# Altium PCB Jump Starter.PcbDoc (part 1 of 2)
Units mm, origin at the board's own origin, x right, y up, seen from the top; angles counter-clockwise.
Board outline 188.98 x 144.65 mm, 2 copper layers (Top Layer, Bottom Layer), stack 1.671 mm thick; 96 components, 60 nets, 320 pads, 764 vias.
Unrouted connection lines stored in the file: 5.
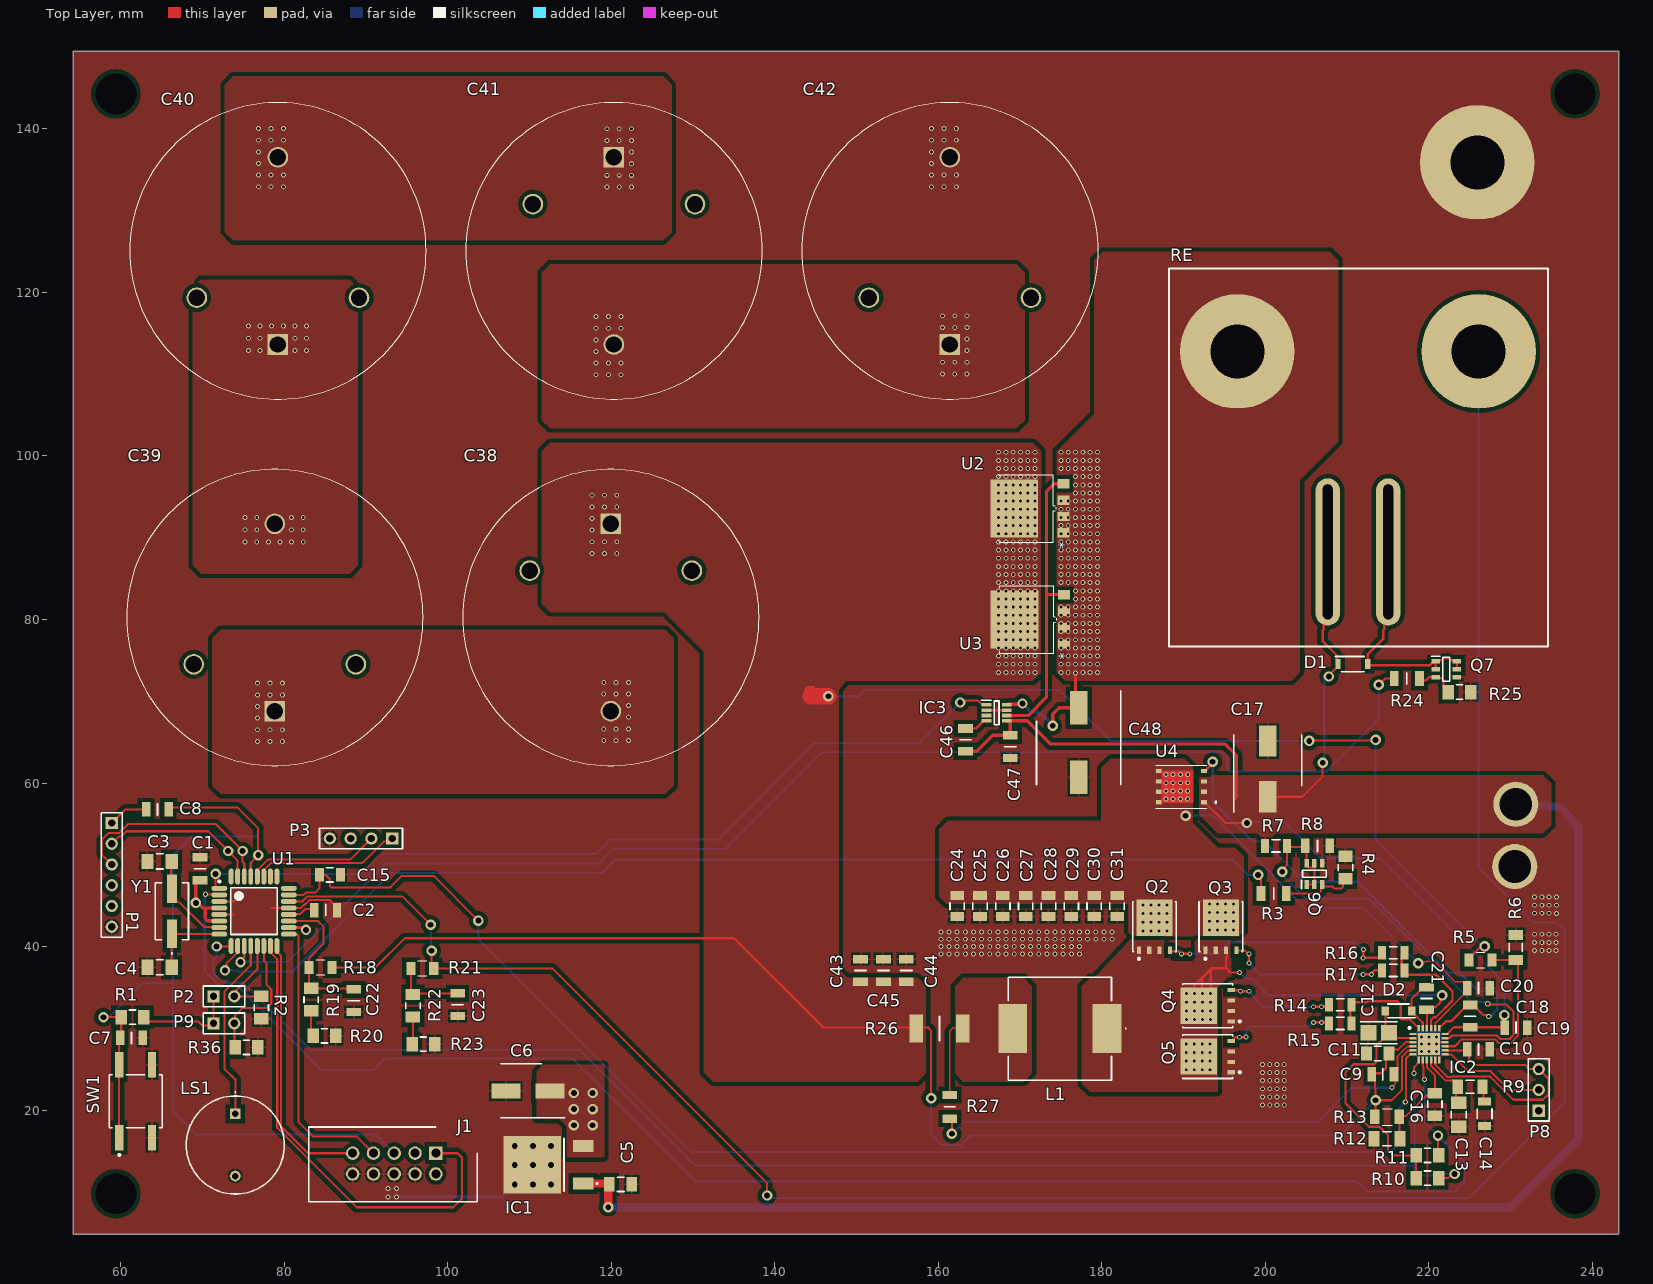
[diagram p0: Top Layer view]
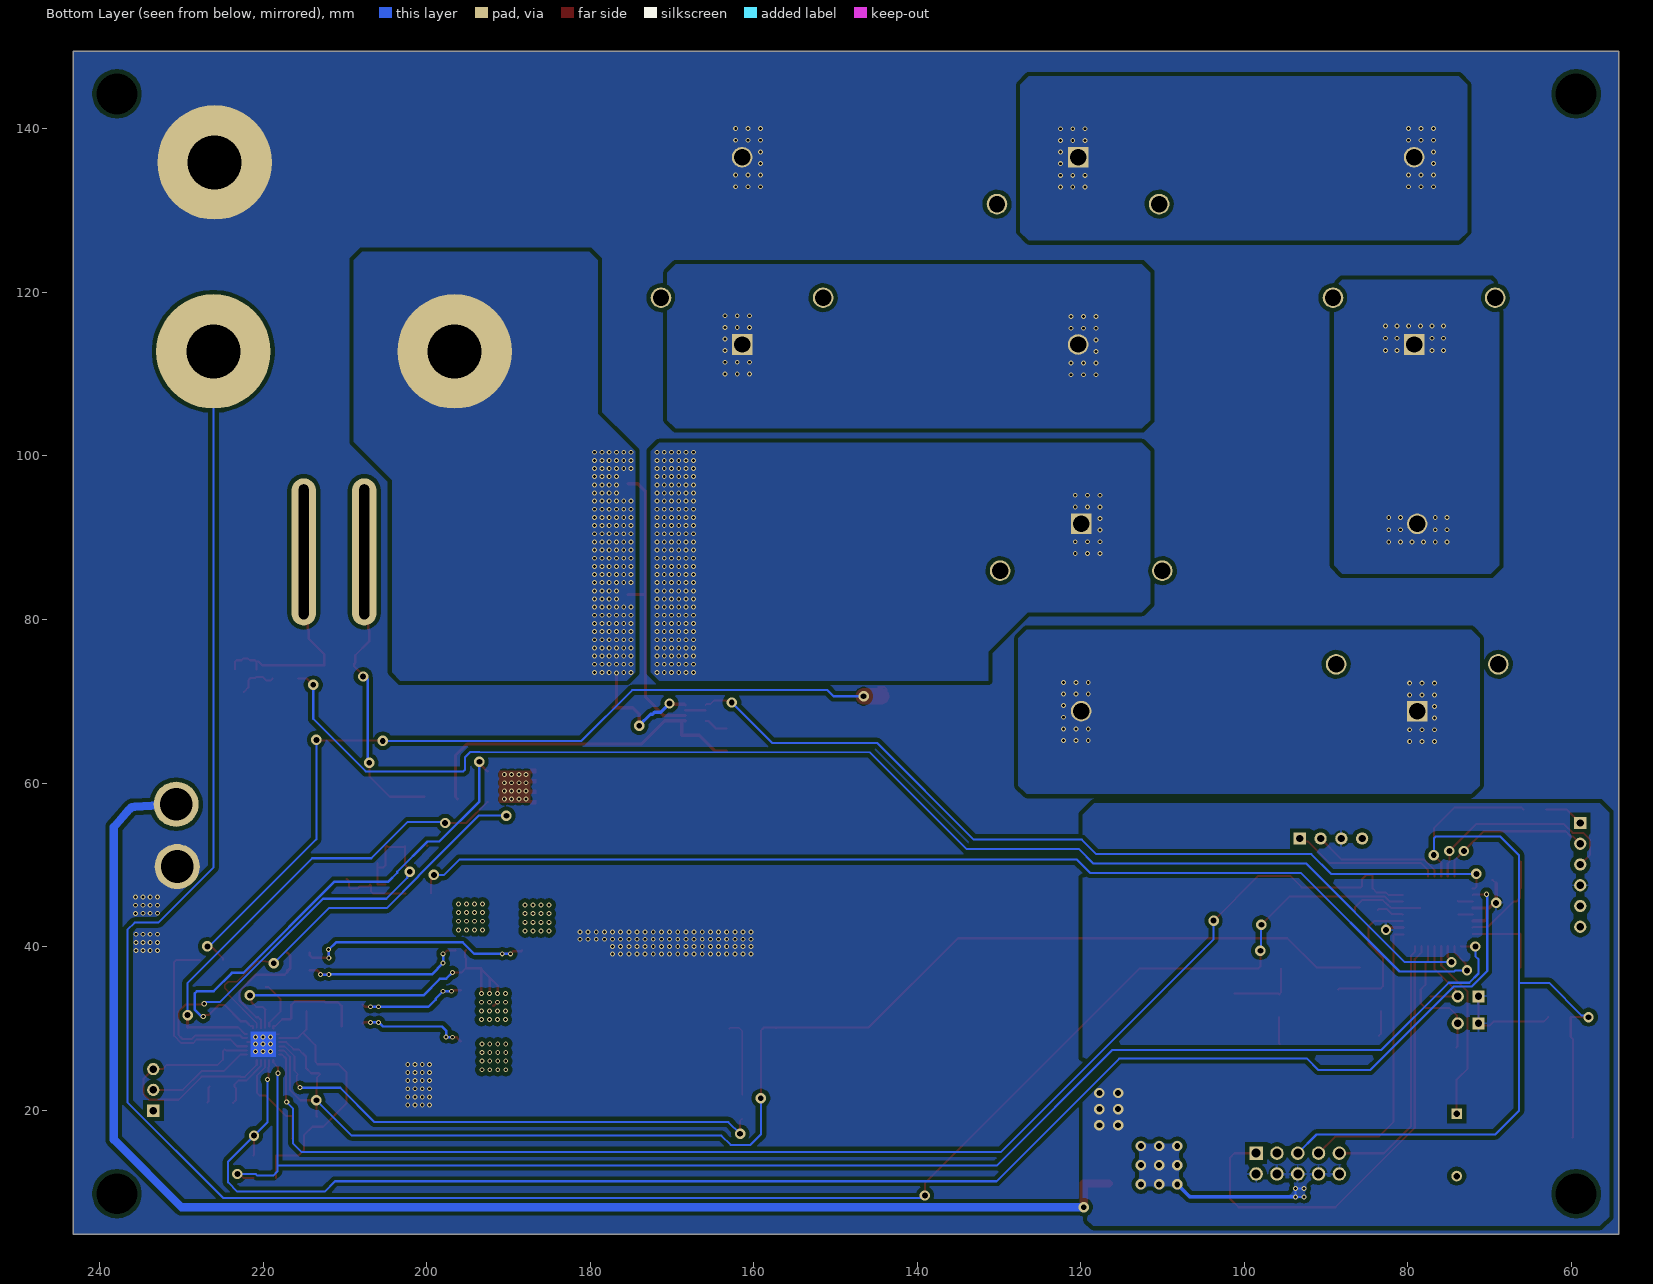
[diagram p1: Bottom Layer view, seen from below]
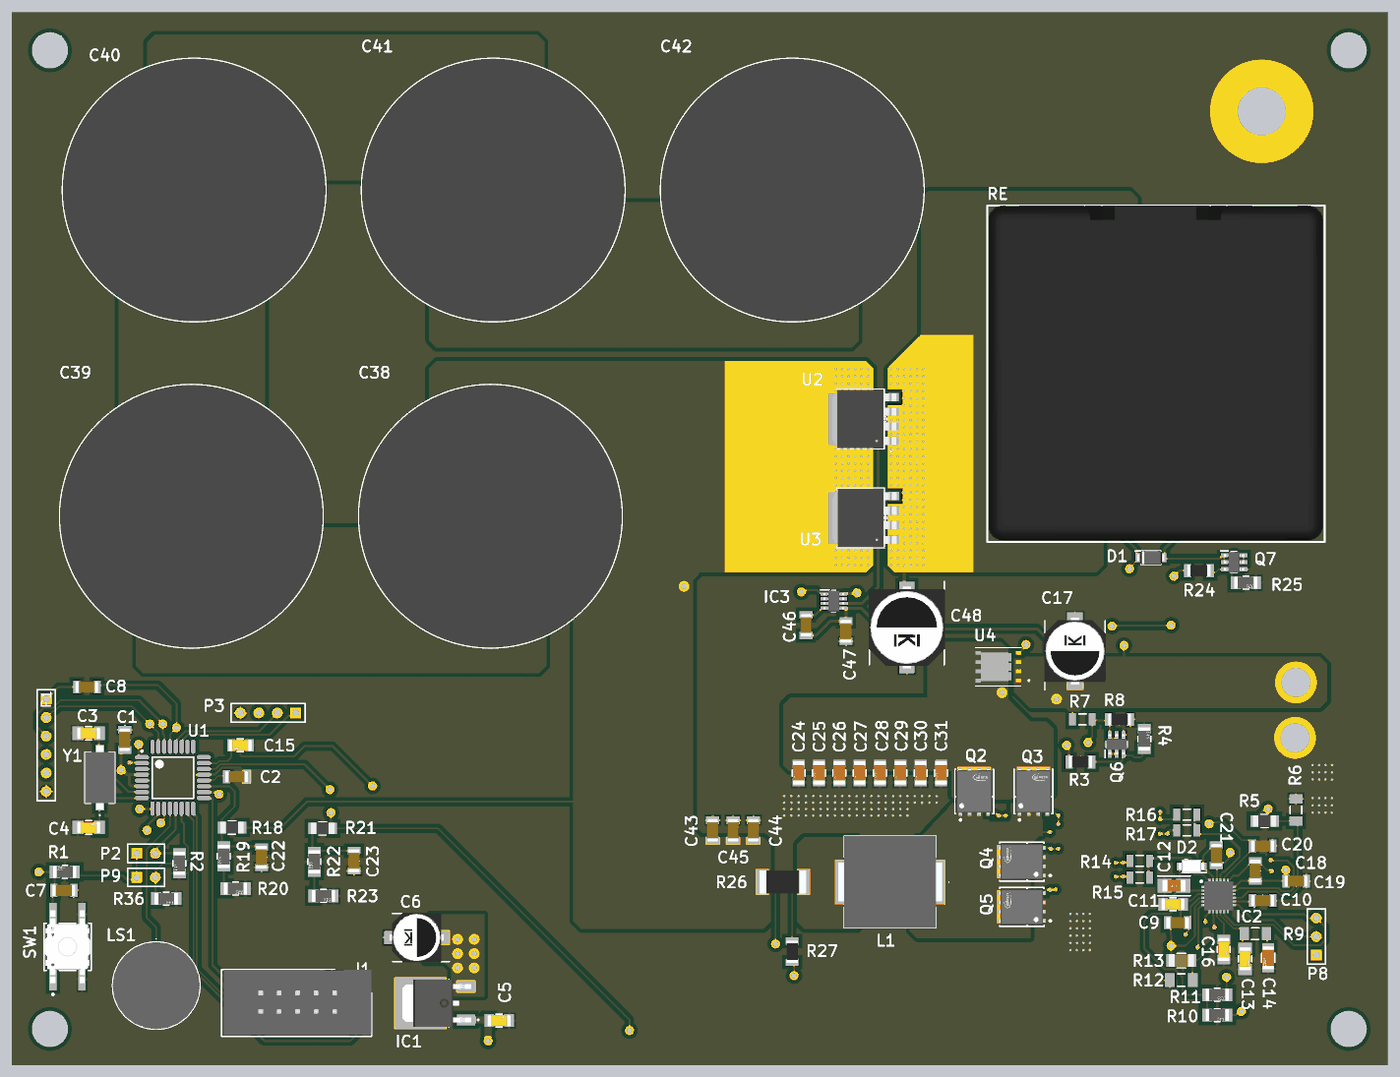
[diagram p3: 3D render of the assembled board from above, using the file's embedded part models]

## Layer stack, top to bottom
Top Solder: solder mask 0.0102, Solder Resist, Dk 3.5
Top Layer: signal copper 0.0356
Dielectric 1: dielectric 1.6, FR-4, Dk 4.8
Bottom Layer: signal copper 0.0356
Bottom Solder: solder mask 0.0102, Solder Resist, Dk 3.5

## Board outline
54.229,4.826 243.205,4.826 243.205,149.479 54.229,149.479

## Design rules (kind name [scope] priority, off if disabled: settings)
Clearance [All] p1: gap=0.5 ignorepadtopadclearanceinfootprint=TRUE except(0.14: SMDPad-SMDPad; 0.21: Arc-Arc Arc-Track Arc-SMDPad Track-Track Track-SMDPad; 0.3: Arc-Via Arc-Text Track-Via Track-Text SMDPad-THPad SMDPad-Via SMDPad-Text SMDPad-Hole THPad-THPad THPad-Via THPad-Text THPad-Hole Via-Via Via-Text Via-Hole Fill-Text Fill-Hole Poly-Text Poly-Hole Region-Text Region-Hole Text-Text Text-Hole; 0.33: Arc-THPad Track-THPad; 0.35: Arc-Hole Track-Hole)
Height [All] p1: minheight=0 maxheight=127 prefheight=12.7
HoleSize [All] p1: absolutevalues=TRUE maxlimit=20 minlimit=0.35 maxpercent=80.000 minpercent=20.000
HoleToHoleClearance [All] p1: gap=0.3 allowstackedmicrovias=TRUE
MinimumAnnularRing [All] p1: minimumring=0.125
MinimumSolderMaskSliver [All] p1: minsoldermaskwidth=0.09
PolygonConnect [All] p1: connectstyle=Relief reliefconductorwidth=0.254 reliefentries=4 polygonreliefangle="90 Angle" airgapwidth=0.254
RoutingVias [All] p1: holewidth=0.711 width=1.27 viastyle="Through Hole" minholewidth=0.35 minwidth=0.6 maxholewidth=0.711 maxwidth=1.27
SilkToSolderMaskClearance [IsPad] p1: minsilkscreentomaskgap=0.2 clearancetoexposedcopper=TRUE
SolderMaskExpansion [All] p1: expansion=0.102 istentingtop=FALSE
Width [All] p1: maxlimit=20 minlimit=0.203 preferedwidth=0.3 bottomlayer_minwidth=0.254 minimp=50.000000 maximp=50.000000 favimp=50.000000
25 further rules are at their usual default settings.

## Components (designator, comment, footprint, x,y, rotation, side; value= is the part's Value field where it differs from the comment)
C1 "CL31A106MAHNNNE" CAPC3216X180N 69.723,49.523 r90 top
C2 "CL31B104KBCNNNC" CAPC3216X100N 85.09,44.45 r0 top
C3 "CL31C220JBCNNNC" FP-CL31-IPC_A 64.77,50.419 r0 top
C4 "CL31C220JBCNNNC" FP-CL31-IPC_A 64.77,37.465 r0 top
C5 "CL31B105KBHNNNE" FP-CL31-IPC_B 121.158,10.922 r0 top
C6 "A766EB226M1DLAE060" CAPAE660X600N 109.822,22.352 r180 top
C7 "CL31B104KBCNNNC" CAPC3216X100N 61.341,28.829 r0 top
C8 "CL31B104KBCNNNC" CAPC3216X100N 64.516,56.769 r180 top
C9 "1206B222K500CT" CAPC3216X90N 214.376,24.384 r0 top
C10 "CL31B104KBCNNNC" CAPC3216X100N 226.06,27.432 r0 top
C11 "CL31B105KBHNNNE" FP-CL31-IPC_B 213.741,26.924 r180 top
C12 "C3216X7R1C685K160AC" FP-C3216-160-0_2-IPC_A 213.868,29.464 r180 top
C13 "CL31C220JBCNNNC" FP-CL31-IPC_A 223.647,19.431 r270 top
C14 "12065A332JAT2A" FP-1206-L_3_2_0_2-W_1_6_0-MFG 226.822,19.558 r270 top
C15 "CL31B102KBCNNNC" FP-CL31-IPC_C 85.598,48.768 r180 top
C16 "CL31B473KBCNNNC" FP-CL31-IPC_B 220.726,20.701 r270 top
C17 "A768KS826M1HLAS020" CAPAE830X1240N 200.279,61.722 r90 top
C18 "1206B222K500CT" CAPC3216X90N 225.044,31.496 r270 top
C19 "CL31B104KBCNNNC" CAPC3216X100N 230.649,30.099 r180 top
C20 "CL31B104KBCNNNC" CAPC3216X100N 226.06,34.925 r180 top
C21 "CL31B474KBHNNNE" CAPC3216X180N 219.71,33.655 r270 top
C22 "CL31B104KBCNNNC" CAPC3216X100N 88.519,33.384 r270 top
C23 "CL31B104KBCNNNC" CAPC3216X100N 101.219,32.893 r270 top
C24 "GRM319R61H475KA12D" FP-GRM319-0_15-IPC_C 162.306,44.958 r270 top
C25 "GRM319R61H475KA12D" FP-GRM319-0_15-IPC_C 165.1,44.958 r270 top
C26 "GRM319R61H475KA12D" FP-GRM319-0_15-IPC_C 167.894,44.958 r270 top
C27 "GRM319R61H475KA12D" FP-GRM319-0_15-IPC_C 170.688,44.958 r270 top
C28 "GRM319R61H475KA12D" FP-GRM319-0_15-IPC_C 173.482,44.958 r270 top
C29 "GRM319R61H475KA12D" FP-GRM319-0_15-IPC_C 176.276,44.958 r270 top
C30 "GRM319R61H475KA12D" FP-GRM319-0_15-IPC_C 179.07,44.958 r270 top
C31 "GRM319R61H475KA12D" FP-GRM319-0_15-IPC_C 181.864,44.958 r270 top
C38 "450F" PCAP_TPLH-3R0/450SS35X71_TCT#1 119.956,91.694 r0 top
C39 "450F" PCAP_TPLH-3R0/450SS35X71_TCT#2 78.867,68.794 r180 top
C40 "450F" PCAP_TPLH-3R0/450SS35X71_TCT#2 79.248,113.625 r180 top locked
C41 "450F" PCAP_TPLH-3R0/450SS35X71_TCT#2 120.337,136.525 r0 top locked
C42 "450F" PCAP_TPLH-3R0/450SS35X71_TCT#2 161.427,113.625 r180 top locked
C43 "C3216X5R1E476M160AC." CAPC3216X180N 150.495,37.084 r90 top
C44 "C3216X5R1E476M160AC." CAPC3216X180N 156.083,37.084 r90 top
C45 "C3216X5R1E476M160AC." CAPC3216X180N 153.289,37.084 r90 top
C46 "CL31B474KBHNNNE" CAPC3216X180N 163.322,65.278 r90 top
C47 "CL31B104KBCNNNC" CAPC3216X100N 168.807,64.45 r270 top
C48 "A768MS227M1GLAS022" CAPAE1030X1270N 177.165,64.965 r270 top
D1 "1655-1N4007FLCT-ND" SODFL3718X140N 210.693,74.549 r0 top
D2 "PMEG10010ELRX" SODFL3517X110N 216.281,32.131 r180 top
IC1 "BD450M5FP-CE2" ROHM_TO-252-3 108.736,13.321 r90 top
IC2 "MAX17701ATG+" QFN50P400X400X80-25N-D 220.009,28.063 r0 top locked
IC3 "LM74502DDFR" SOT65P280X110-8N 167.132,68.58 r0 top
J1 "T821110A1S100CEU" SHDR10W64P254X254_2X5_2032X895X915P 98.552,14.732 r180 top
L1 "SRP1265WA-5R6M" SRP1265WA5R6M 174.879,29.972 r180 top
LS1 "" CMI12950585T 74.041,19.538 r0 top
P1 "Header 6" HDR1X6 58.928,55.118 r270 top
P2 "Header 2" HDR1X2 71.374,33.909 r0 top
P3 "OLED" HDR1X4 93.218,53.213 r180 top
P8 "Header 3" HDR1X3 233.426,19.939 r90 top
P9 "Header 2" HDR1X2 71.374,30.607 r0 top
Q2 "BSC032N04LSATMA1" FP-PG-TDSON-8-MFG 186.436,42.418 r0 top
Q3 "BSC032N04LSATMA1" FP-PG-TDSON-8-MFG 194.564,42.418 r0 top
Q4 "BSC032N04LSATMA1" FP-PG-TDSON-8-MFG 192.969,32.766 r90 top
Q5 "BSC032N04LSATMA1" FP-PG-TDSON-8-MFG 192.969,26.543 r90 top
Q6 "DMN4060SVT-7" SOT95P280X100-6N 205.994,48.895 r90 top
Q7 "DMN4060SVT-7" SOT95P280X100-6N 222.123,73.914 r0 top
R1 "RMCF1206FT10K0" FP-RMCF1206-IPC_B 61.468,31.369 r180 top
R2 "RMCF1206FT10K0" FP-RMCF1206-IPC_B 77.216,32.533 r270 top
R3 "RMCF1206FT200R" RESC3216X70N 201.015,46.482 r0 top
R4 "RMCF1206FT10K0" FP-RMCF1206-IPC_B 209.804,49.657 r90 top
R5 "RC1206FR-0775KL" RC1206N_YAG 226.314,38.354 r180 top
R6 "RC1206FR-077K15L" RESC3116X65X40ML10T20 230.632,39.878 r90 top
R7 "311-174KFRCT-ND" RESC1206(3216)_L 201.295,52.324 r0 top value=174K
R8 "RC1206FR-0713KL" RESC3116X65N 206.375,52.324 r0 top
R9 "RC1206FR-0743K2L" RESC3116X65X40ML10T20 225.044,22.86 r0 top
R10 "RMCF1206FT10K0" FP-RMCF1206-IPC_B 219.816,11.684 r0 top
R11 "RMCF1206FT10K0" FP-RMCF1206-IPC_B 219.816,14.478 r0 top
R12 "RK73H2BTTD1372F" RESC3216X70X40ML20T20 214.884,16.51 r0 top
R13 "RMCF1206FT140K" RES_RMCF1206_STP 214.884,19.177 r180 top
R14 "RK73H2BTTD1R00F" RESC3216X70X40LL20T20 209.169,32.893 r0 top
R15 "RK73H2BTTD1R00F" RESC3216X70X40LL20T20 209.169,30.607 r180 top
R16 "RK73H2BTTD1R00F" RESC3216X70X40LL20T20 215.646,39.243 r180 top
R17 "RK73H2BTTD1R00F" RESC3216X70X40LL20T20 215.646,37.084 r0 top
R18 "RC1206FR-0775KL" RC1206N_YAG 84.455,37.465 r180 top
R19 "RMCF1206FT10K0" FP-RMCF1206-IPC_B 83.312,33.507 r270 top
R20 "RMCF1206FT10K0" FP-RMCF1206-IPC_B 84.935,29.083 r0 top
R21 "RC1206FR-0775KL" RC1206N_YAG 96.901,37.338 r180 top
R22 "RMCF1206FT10K0" FP-RMCF1206-IPC_B 95.758,32.766 r270 top
R23 "RMCF1206FT10K0" FP-RMCF1206-IPC_B 97.028,28.067 r0 top
R24 "RMCF1206FT200R" RESC3216X70N 217.297,72.771 r0 top
R25 "RMCF1206FT10K0" FP-RMCF1206-IPC_B 223.753,71.12 r0 top
R26 "CRF2512-FZ-R005ELF" RESC6432X80N 160.147,29.972 r180 top
R27 "CRT1206-BY-40R2ELF" RESC3016X65N 161.417,20.407 r270 top
R36 "RMCF1206FT10K0" FP-RMCF1206-IPC_B 75.417,27.686 r0 top
RE "Relay" PCBComponent_1 211.328,99.949 r0 top
SW1 "1571634-2" FP-1571634-2-MFG 61.849,21.082 r90 top
U1 "ATmega328P-AU" 32A_M 76.327,44.323 r0 top
U2 "SQJQ140E-T1_GE3" DPAK_140E-T1_GE3_VIS 170.777,93.599 r90 top
U3 "SQJQ140E-T1_GE3" DPAK_140E-T1_GE3_VIS 170.815,80.01 r90 top
U4 "SIR170DP-T1-RE3" MOSFET_DP-T1-RE3_VIS 189.738,59.563 r180 top
Y1 "ECS-160-20-3X-TR" ECS160203XTR 66.294,44.323 r90 top

## Footprints (in the part's own frame and the unit in brackets; to place one, negate y for a bottom-side part, rotate by r counter-clockwise, add the part's x,y. Pads: shape width x height; smd on the part's side, far side on the other; paste and mask are expansions set on the pad)
32A_M [mm] "Thin QFP, 32-Leads, Body 7x7mm, Pitch 0.8mm, IPC Low Density"
  oval 1.95x0.6 smd: 1(-4.25,2.8) 2(-4.25,2) 3(-4.25,1.2) 4(-4.25,0.4) 5(-4.25,-0.4) 6(-4.25,-1.2) 7(-4.25,-2) 8(-4.25,-2.8) 17(4.25,-2.8) 18(4.25,-2) 19(4.25,-1.2) 20(4.25,-0.4) 21(4.25,0.4) 22(4.25,1.2) 23(4.25,2) 24(4.25,2.8)
  oval 0.6x1.95 smd: 9(-2.8,-4.25) 10(-2,-4.25) 11(-1.2,-4.25) 12(-0.4,-4.25) 13(0.4,-4.25) 14(1.2,-4.25) 15(2,-4.25) 16(2.8,-4.25) 25(2.8,4.25) 26(2,4.25) 27(1.2,4.25) 28(0.4,4.25) 29(-0.4,4.25) 30(-1.2,4.25) 31(-2,4.25) 32(-2.8,4.25)
  silkscreen extent -4.37,-2.85 2.85,3.77, body extent -3.5,-3.5 3.5,3.5, height 1.2
CAPAE660X600N [mm]
  rect 3.55x1.85 smd: 1(-2.7,0) 2(2.7,0)
  silkscreen extent -4.47,-3.3 3.3,3.3, body extent -3.75,-3.4 3.75,3.4, height 6
CAPAE830X1240N [mm]
  rect 3.8x2.15 smd: 1(-3.4,0) 2(3.4,0)
  silkscreen extent -5.3,-4.15 4.15,4.15, body extent -4.6,-4.25 4.6,4.25, height 12.5
CAPAE1030X1270N [mm]
  rect 4.1x2.15 smd: 1(-4.25,0) 2(4.25,0)
  silkscreen extent -6.3,-5.15 5.15,5.15, body extent -5.6,-5.25 5.6,5.25, height 12.7
CAPC3216X90N [mm]
  rect 1.06x1.78 smd: 1(-1.36,0) 2(1.36,0)
  silkscreen extent 0,-0.7 0,0.7, body extent -1.6,-0.8 1.6,0.8, height 0.9
CAPC3216X100N [mm]
  rect 1.02x1.78 smd: 1(-1.38,0) 2(1.38,0)
  silkscreen extent 0,-0.7 0,0.7, body extent -1.6,-0.8 1.6,0.8, height 1
CAPC3216X180N [mm]
  rect 1.05x1.82 smd: 1(-1.39,0) 2(1.39,0)
  silkscreen extent 0,-0.7 0,0.7, body extent -1.6,-0.8 1.6,0.8, height 1.8
CMI12950585T [mm]
  rect 1.3x1.3 hole 0.8: 1(0,0)
  round 1.3 hole 0.8: 2(0,-7.6)
  silkscreen extent -6,-9.8 6,2.7, body extent -6,-9.79 6,2.19, height 9.8
DPAK_140E-T1_GE3_VIS [mil]
  rect 45x58 smd paste+0 mask+0: 1(-118.11,-179.5) 2(-39.37,-179.5) 3(39.37,-179.5) 4(118.11,-179.5)
  rect 279x230 smd paste+0 mask+0: 5(0,58.5)
  silkscreen extent -162,-144 162,130, body extent -157,-194 157,153, height 67
ECS160203XTR [mm]
  rect 3.5x1.2 smd: 1(-2.75,0) 2(2.75,0)
  silkscreen extent -5.2,-2.05 3.5,2.05, body extent -4.38,-2.05 4.38,2.05, height 2.4
FP-1206-L_3_2_0_2-W_1_6_0-MFG [mm]
  rect 1x1.6 smd paste+0 mask+0: 1(-1.5,0) 2(1.5,0)
  silkscreen extent -0.63,-0.9 0.63,0.9, body extent -2.1,-1 2.1,1, height 0.25
FP-1571634-2-MFG [mm]
  rect 3.1x1 smd paste+0 mask+0: 1(-4.45,2) 2(4.45,2) 3(-4.45,-2) 4(4.45,-2)
  silkscreen extent -6.67,-3.25 3.25,3.25, body extent -6.1,-3.35 6.1,3.35, height 0.25
FP-C3216-160-0_2-IPC_A [mm]
  rect 1.954x1.906 smd paste+0 mask+0: 1(-1.276,0) 2(1.276,0)
  silkscreen extent -2.25,-1.35 2.25,1.35, body extent -2.75,-1.45 2.75,1.45, height 0.25
FP-CL31-IPC_A [mm]
  rect 1.505x1.858 smd paste+0 mask+0: 1(-1.476,0) 2(1.476,0)
  silkscreen extent -0.42,-0.93 0.42,0.93, body extent -2.73,-1.43 2.73,1.43, height 0.25
FP-CL31-IPC_B [mm]
  rect 1.305x1.758 smd paste+0 mask+0: 1(-1.376,0) 2(1.376,0)
  silkscreen extent -0.42,-0.88 0.42,0.88, body extent -2.28,-1.13 2.28,1.13, height 0.25
FP-CL31-IPC_C [mm]
  rect 1.105x1.658 smd paste+0 mask+0: 1(-1.276,0) 2(1.276,0)
  silkscreen extent -0.42,-0.87 0.42,0.87, body extent -1.93,-0.97 1.93,0.97, height 0.25
FP-GRM319-0_15-IPC_C [mm]
  rect 1.106x1.658 smd paste+0 mask+0: 1(-1.276,0) 2(1.276,0)
  silkscreen extent -0.42,-0.87 0.42,0.87, body extent -1.93,-0.97 1.93,0.97, height 0.25
FP-PG-TDSON-8-MFG [mm]
  rect 0.5x0.925 smd paste-1000 mask+0: 1(-1.905,-2.865) 2(-0.635,-2.865) 3(0.635,-2.865) 4(1.905,-2.865)
  rect 4.41x4.455 smd paste-1000: 5-6-7-8(0,1.098)
  silkscreen extent -2.68,-4.03 2.68,3.05, body extent -2.78,-3.43 2.78,3.42, height 0.25
FP-RMCF1206-IPC_B [mm]
  rect 1.404x1.758 smd paste+0 mask+0: 1(-1.376,0) 2(1.376,0)
  silkscreen extent -0.37,-0.88 0.37,0.88, body extent -2.33,-1.13 2.33,1.13, height 0.25
HDR1X2 [mm] "Connector; Header; 2 Position"
  rect 1.5x1.5 hole 0.9: 1(0,0)
  round 1.5 hole 0.9: 2(2.54,0)
  silkscreen extent -1.27,-1.27 3.81,1.27
HDR1X3 [mm] "Connector; Header; 3 Position"
  rect 1.5x1.5 hole 0.9: 1(0,0)
  round 1.5 hole 0.9: 2(2.54,0) 3(5.08,0)
  silkscreen extent -1.27,-1.27 6.35,1.27
HDR1X4 [mm] "Connector; Header; 4 Position"
  rect 1.5x1.5 hole 0.9: 1(0,0)
  round 1.5 hole 0.9: 2(2.54,0) 3(5.08,0) 4(7.62,0)
  silkscreen extent -1.27,-1.27 8.89,1.27
HDR1X6 [mm] "Connector; Header; 6 Position"
  rect 1.5x1.5 hole 0.9: 1(0,0)
  round 1.5 hole 0.9: 2(2.54,0) 3(5.08,0) 4(7.62,0) 5(10.16,0) 6(12.7,0)
  silkscreen extent -1.27,-1.27 13.97,1.27
MOSFET_DP-T1-RE3_VIS [mil]
  rect 28x20 smd paste-10 mask+0: 1(-109.06,75) 2(-109.06,25) 3(-109.06,-25) 4(-109.06,-75) 5(109.06,-75) 6(109.06,-25) 7(109.06,25) 8(109.06,75)
  Top Layer region: -55.94,77 95.06,77 95.06,85 123.06,85 123.06,65 95.06,65 95.06,35 123.06,35 123.06,15 95.06,15 95.06,-15 123.06,-15 123.06,-35 95.06,-35 95.06,-65 123.06,-65 123.06,-85 95.06,-85 95.06,-77 -55.94,-77
  silkscreen extent -171,-104 123,104
PCAP_TPLH-3R0/450SS35X71_TCT#1 [mil]
  rect 99x99 hole 79 paste-49.5 mask+0: 1(0,0)
  round 99 hole 79 paste-49.5 mask+0: 2(0,-901.57) 3(-390.39,-225.39) 4(390.39,-225.39)
  silkscreen extent -714,-1164 714,263, body extent -709,-1159 707,257, height 2874
PCAP_TPLH-3R0/450SS35X71_TCT#2 [mil]
  rect 99x99 hole 79 paste-49.5 mask+0: 1(0,0)
  round 99 hole 79 paste-49.5 mask+0: 2(0,-901.57)
  round 99 / inner round 60 / far side round 99 hole 79 paste-49.5 mask+0: 3(-390.39,-225.39) 4(390.39,-225.39)
  silkscreen extent -714,-1164 714,263, body extent -709,-1159 707,257, height 2874
PCBComponent_1 [mm]
  oval 3x18 hole 1.2 slot 16.5 at 90 deg: 0(-3.7,-11.684) 1(3.7,-11.684)
  round 14 hole 6.6: 2(-14.75,12.827) 3(14.75,12.827)
  silkscreen extent -23.11,-23.24 23.24,22.99, body extent -23,-23 23,23, height 61.51
QFN50P400X400X80-25N-D [mm]
  rect 0.85x0.3 smd mask+0.03: 1(-1.95,1.25) 2(-1.95,0.75) 3(-1.95,0.25) 4(-1.95,-0.25) 5(-1.95,-0.75) 6(-1.95,-1.25) 13(1.95,-1.25) 14(1.95,-0.75) 15(1.95,-0.25) 16(1.95,0.25) 17(1.95,0.75) 18(1.95,1.25)
  rect 0.3x0.85 smd mask+0.03: 7(-1.25,-1.95) 8(-0.75,-1.95) 9(-0.25,-1.95) 10(0.25,-1.95) 11(0.75,-1.95) 12(1.25,-1.95) 19(1.25,1.95) 20(0.75,1.95) 21(0.25,1.95) 22(-0.25,1.95) 23(-0.75,1.95) 24(-1.25,1.95)
  rect 2.7x2.7 smd paste+0 mask+0: 25(0,0)
  silkscreen extent -2.5,1.88 -2.25,2.12, body extent -2.05,-2.05 2.05,2.05, height 0.8
RC1206N_YAG [mil]
  rect 44x63 smd paste+0 mask+0: 1(-55,0) 2(55,0)
  silkscreen extent -21,-36 21,36, body extent -63,-31 63,31, height 28
RES_RMCF1206_STP [mil]
  rect 46x69 smd paste+0 mask+0: 1(-59,0) 2(59,0)
  silkscreen extent -24,-40 24,40, body extent -68,-34 68,34, height 228
RESC1206(3216)_L [mm] "Chip Resistor, Body 3.2x1.6mm, IPC High Density"
  rect 0.95x1.7 smd: 1(-1.35,0) 2(1.35,0)
  silkscreen extent -0.5,-0.75 0.5,0.75, body extent -1.67,-0.87 1.67,0.87, height 0.75
RESC3016X65N [mm]
  rect 1x1.75 smd: 1(-1.45,0) 2(1.45,0)
  silkscreen extent 0,-0.67 0,0.67, body extent -1.53,-0.77 1.53,0.77, height 0.65
RESC3116X65N [mm]
  rect 1x1.75 smd: 1(-1.5,0) 2(1.5,0)
  silkscreen extent 0,-0.7 0,0.7, body extent -1.55,-0.8 1.55,0.8, height 0.65
RESC3116X65X40ML10T20 [mm] "Chip Resistor, 2-Leads, Body 3.10x1.60mm, IPC Low Density"
  rect 1.25x1.8 smd: 1(-1.525,0) 2(1.525,0)
  silkscreen extent -0.5,-0.8 0.5,0.8, body extent -1.6,-0.85 1.6,0.85, height 0.65
RESC3216X70N [mm]
  rect 1.05x1.8 smd: 1(-1.55,0) 2(1.55,0)
  silkscreen extent 0,-0.7 0,0.7, body extent -1.6,-0.8 1.6,0.8, height 0.7
RESC3216X70X40LL20T20 [mm] "Chip Resistor, 2-Leads, Body 3.20x1.60mm, IPC High Density"
  rect 0.95x1.7 smd: 1(-1.375,0) 2(1.375,0)
  silkscreen extent -0.5,-0.75 0.5,0.75, body extent -1.7,-0.9 1.7,0.9, height 0.7
RESC3216X70X40ML20T20 [mm] "Chip Resistor, 2-Leads, Body 3.20x1.60mm, IPC Low Density"
  rect 1.35x1.9 smd: 1(-1.575,0) 2(1.575,0)
  silkscreen extent -0.5,-0.85 0.5,0.85, body extent -1.7,-0.9 1.7,0.9, height 0.7
RESC6432X80N [mm]
  rect 1.65x3.4 smd: 1(-2.85,0) 2(2.85,0)
  silkscreen extent 0,-1.5 0,1.5, body extent -3.2,-1.6 3.2,1.6, height 0.8
ROHM_TO-252-3 [mm]
  rect 1.5x2.5 smd: 1(-2.3,-7.85) 2(2.3,-7.85)
  rect 7x7 smd: 3(0,-1.6)
  silkscreen extent -3.25,-9.63 3.25,-5.5, body extent -3.25,-8.62 3.25,0.88, height 2.3
SHDR10W64P254X254_2X5_2032X895X915P [mm]
  rect 1.65x1.65 hole 1.1: 1(0,0)
  round 1.65 hole 1.1: 2(0,2.54) 3(2.54,0) 4(2.54,2.54) 5(5.08,0) 6(5.08,2.54) 7(7.62,0) 8(7.62,2.54) 9(10.16,0) 10(10.16,2.54)
  silkscreen extent -5.08,-3.2 15.54,5.94, body extent -5.08,-3.2 15.24,5.74, height 9.15
SODFL3517X110N [mm]
  rect 0.92x1.08 smd: 1(-1.6,0) 2(1.6,0)
  silkscreen extent -2.06,-0.85 1.3,0.85, body extent -1.75,-1.09 1.75,0.91, height 1.07
SODFL3718X140N [mm]
  rect 0.63x1.22 smd: 1(-1.825,0) 2(1.825,0)
  silkscreen extent -2.14,-0.92 1.38,0.92, body extent -1.85,-0.92 1.85,0.92, height 1.4
SOT65P280X110-8N [mm]
  rect 1.2x0.45 smd: 1(-1.25,0.975) 2(-1.25,0.325) 3(-1.25,-0.325) 4(-1.25,-0.975) 5(1.25,-0.975) 6(1.25,-0.325) 7(1.25,0.325) 8(1.25,0.975)
  silkscreen extent -1.85,-1.45 0.3,1.55, body extent -1.4,-1.45 1.4,1.45, height 1.1
SOT95P280X100-6N [mm]
  rect 1.05x0.55 smd: 1(-1.3,0.95) 2(-1.3,0) 3(-1.3,-0.95) 4(1.3,-0.95) 5(1.3,0) 6(1.3,0.95)
  silkscreen extent -1.83,-1.45 0.43,1.58, body extent -1.4,-1.45 1.4,1.45, height 1
SRP1265WA5R6M [mm]
  rect 3.5x6 smd: 1(-5.75,0) 2(5.75,0)
  silkscreen extent -8.1,-6.3 6.3,6.3, body extent -7.15,-6.3 7.15,6.3, height 6.6

## Part data
C1: "CAP CER 10UF 25V X5R 1206 CL31A106MAHNNNE", Capacitance=10uF, Manufacturer_Name=SAMSUNG, Mouser Part Number=187-CL31A106MAHNNNE, Supplier Part Number 1=1276-1181-1-ND, Arrow Part Number=CL31A106MAHNNNE, Arrow Price/Stock=https://www.arrow.com/en/products/cl31a106mahnnne/samsung-electro-mechanics, Datasheet Link=https://www.arrow.com/en/products/cl31a106mahnnne/samsung-electro-mechanics, Height=1.8mm, Manufacturer_Part_Number=CL31A106MAHNNNE, Mouser Price/Stock=https://www.mouser.co.uk/ProductDetail/Samsung-Electro-Mechanics/CL31A106MAHNNNE?qs=9y2YoPkPyvYkOWbcUKSn%252BQ%3D%3D, Supplier 1=Digi-Key
C2 C7 C10 C19 C20 C22 C23 C47: "CAP CER 0.1UF 50V X7R 1206", Capacitance=0.1uF, Manufacturer_Name=SAMSUNG, Mouser Part Number=187-CL31B104KBCNNNC, Supplier Part Number 1=1276-1017-1-ND, Arrow Part Number=CL31B104KBCNNNC, Arrow Price/Stock=https://www.arrow.com/en/products/cl31b104kbcnnnc/samsung-electro-mechanics?region=nac, Datasheet Link=https://datasheet.datasheetarchive.com/originals/distributors/Datasheets_SAMA/0fdb6a11e020a7299f4d0713dd2bd7ee.pdf, Height=1mm, Mouser Price/Stock=https://www.mouser.co.uk/ProductDetail/Samsung-Electro-Mechanics/CL31B104KBCNNNC?qs=349EhDEZ59oHABbyGq1iKA%3D%3D, Supplier 1=Digi-Key
  C2 C47: Manufacturer_Part_Number 1=CL31B104KBCNNNC
  C7 C10 C19 C20 C22 C23: Manufacturer_Part_Number=CL31B104KBCNNNC
C3 C4 C13: library part CMP-13271-001055-1, "Cap Ceramic 22pF 50V C0G ±5% SMD 1206 +125°C Embossed T/R", Capacitance=22pF, Case Code (Imperial)=1206, Case Code (Metric)=3216, Dielectric=C0G, Max Operating Temperature=125°C, Min Operating Temperature=-55°C, Package Quantity=1, Temperature Coefficient=300ppm/°C, Tolerance=5%, Voltage=50V, Case/Package=1206, Depth=1.6mm, Height=0.85mm, Lead Free="Lead Free", Length=3.2mm, Material=Ceramic, Mount="Surface Mount", Packaging="Tape and Reel", Radiation Hardening=No, Thickness=0.039inch, Voltage Rating=50V, Voltage Rating (DC)=50V, Width=0.063inch
C5 C11: library part CMP-13271-001662-1, "Cap Ceramic 1uF 50V X7R ±10% SMD 1206 +125°C Embossed T/R", Capacitance=1uF, Case Code (Imperial)=1206, Case Code (Metric)=3216, Dielectric=X7R, Max Operating Temperature=125°C, Min Operating Temperature=-55°C, Package Quantity=1, Tolerance=10%, Voltage=50V, Case/Package=1206, Contact Plating=Tin, Depth=1.6mm, Height=1.6mm, Lead Free="Lead Free", Length=3.2mm, Material=Ceramic, Mount="Surface Mount", Packaging="Tape and Reel", Radiation Hardening=No, Thickness=0.071inch, Voltage Rating=50V, Voltage Rating (DC)=50V, Width=0.063inch
C6: "CAP ALUM POLY 22UF 20% 20V SMD", Capacitance=22uF, Manufacturer_Name=KEMET, Mouser Part Number=80-A766EB226M1DLAE60, Supplier Part Number 1=399-A766EB226M1DLAE060CT-ND, Datasheet Link=https://content.kemet.com/datasheets/KEM_A4089_A766.pdf, Height=6mm, Manufacturer_Part_Number=A766EB226M1DLAE060, Mouser Price/Stock=https://www.mouser.co.uk/ProductDetail/KEMET/A766EB226M1DLAE060?qs=vmHwEFxEFR9cZ7fvMzQbpw%3D%3D, Supplier 1=Digi-Key
C8: "CAP CER 0.1UF 50V X7R 1206 CL31B104KBCNNNC", Capacitance=0.1uF, Manufacturer_Name=SAMSUNG, Mouser Part Number=187-CL31B104KBCNNNC, Supplier Part Number 1=1276-1017-1-ND, Arrow Part Number=CL31B104KBCNNNC, Arrow Price/Stock=https://www.arrow.com/en/products/cl31b104kbcnnnc/samsung-electro-mechanics?region=nac, Datasheet Link=https://datasheet.datasheetarchive.com/originals/distributors/Datasheets_SAMA/0fdb6a11e020a7299f4d0713dd2bd7ee.pdf, Height=1mm, Manufacturer_Part_Number=CL31B104KBCNNNC, Mouser Price/Stock=https://www.mouser.co.uk/ProductDetail/Samsung-Electro-Mechanics/CL31B104KBCNNNC?qs=349EhDEZ59oHABbyGq1iKA%3D%3D, Supplier 1=Digi-Key
C9 C18: "Capacitor", Capacitance=2.2nF, Manufacturer_Name="Walsin Technology Corporation", Supplier Part Number 1=1292-1608-1-ND, Datasheet Link=https://eu.mouser.com/datasheet/2/210/WTC_MLCC_General_Purpose-1534899.pdf, Height=0.9mm, Manufacturer_Part_Number=1206B222K500CT, Supplier 1=Digi-Key
C12: library part CMP-08246-004935-1, "Multilayer Ceramic Capacitors 6.8uF ±10% 16V X7R SMD 1206", Capacitance=6.8uF, Case Code (Imperial)=1206, Case Code (Metric)=3216, Dielectric=X7R, Dielectric Material=Ceramic, Max Operating Temperature=125°C, Min Operating Temperature=-55°C, Package Quantity=1, Tolerance=10%, Voltage=16V, Case/Package=1206, Construction=Flat, Depth=1.6mm, Height=1.6mm, Lead Free="Lead Free", Length=3.2mm, Mount="Surface Mount", Number of Pins=2, Packaging="Tape and Reel", Radiation Hardening=No, REACH SVHC="No SVHC", Resistor Type=Ceramic, RoHS Compliant=Yes, Series=C, Termination=SMD/SMT, Thickness=0.071inch, Voltage Rating=16V, Voltage Rating (DC)=16V, Weight=0.000571oz, Width=0.063inch
C14: library part CMP-1037-02951-2, "General Purpose Ceramic Capacitor, 1206, 3.3nF, 5%, NP0, 30ppm/°C, 50V", Capacitance=3.3nF, Case Code (Imperial)=1206, Case Code (Metric)=3216, Dielectric=C0G, Dielectric Material=Ceramic, Max Operating Temperature=125°C, Min Operating Temperature=-55°C, Package Quantity=1, Temperature Coefficient=30ppm/°C, Tolerance=5%, Voltage=50V, Case/Package=1206, Construction=Flat, Contact Plating=Tin, Depth=1.6mm, Dissipation Factor=2.5%, Height=1.27mm, Lead Free="Lead Free", Length=3.2mm, Mount="Surface Mount", Number of Pins=2, Packaging="Tape and Reel", Radiation Hardening=No, REACH SVHC="No SVHC", RoHS Compliant=Yes, Series=-, Termination=SMD/SMT, Thickness=0.05inch, Voltage Rating=50V, Voltage Rating (DC)=50V, Width=0.063inch
C15: library part CMP-13271-001948-1, "Cap Ceramic 1nF 50V X7R ±10% SMD 1206 +125°C Embossed T/R", Capacitance=1nF, Case Code (Imperial)=1206, Case Code (Metric)=3216, Dielectric=X7R, Max Operating Temperature=125°C, Min Operating Temperature=-55°C, Package Quantity=4000, Tolerance=10%, Voltage=63V, Voltage Rating=50V, Case/Package=1206, Depth=1.6mm, Height=0.85mm, Lead Free="Lead Free", Length=3.2mm, Material=Ceramic, Mount="Surface Mount", Packaging="Tape and Reel", Radiation Hardening=No, Thickness=0.037inch, Voltage Rating (DC)=50V, Width=0.063inch
C16: library part CMP-13271-000358-1, "Cap Ceramic 47nF 50V X7R ±10% SMD 1206 +125°C Embossed T/R", Capacitance=47nF, Case Code (Imperial)=1206, Case Code (Metric)=3216, Dielectric=X7R, Max Operating Temperature=125°C, Min Operating Temperature=-55°C, Tolerance=10%, Voltage=50V, Case/Package=1206, Depth=1.6mm, Height=0.85mm, Lead Free="Lead Free", Length=3.2mm, Material=Ceramic, Mount="Surface Mount", Packaging="Tape and Reel", Radiation Hardening=No, Thickness=0.039inch, Voltage Rating=50V, Voltage Rating (DC)=50V, Width=0.063inch
C17: "CAP ALUM POLY 82UF 20% 50V SMD", Capacitance=82uF, Manufacturer_Name=KEMET, Mouser Part Number=80-A768KS826M1HLAS20, Supplier Part Number 1=399-A768KS826M1HLAS020CT-ND, Datasheet Link=https://content.kemet.com/datasheets/KEM_A4088_A768.pdf, Height=12.4mm, Manufacturer_Part_Number=A768KS826M1HLAS020, Mouser Price/Stock=https://www.mouser.co.uk/ProductDetail/KEMET/A768KS826M1HLAS020?qs=yqaQSyyJnNiK6owm%2FGFRvA%3D%3D, Supplier 1=Digi-Key
C21 C46: "CAP CER 0.47UF 50V X7R 1206", Capacitance=0.47uF, Manufacturer_Name=SAMSUNG, Mouser Part Number=187-CL31B474KBHNNNE, Supplier Part Number 1=1276-1118-1-ND, Arrow Part Number=CL31B474KBHNNNE, Arrow Price/Stock=https://www.arrow.com/en/products/cl31b474kbhnnne/samsung-electro-mechanics?region=nac, Datasheet Link=https://datasheet.datasheetarchive.com/originals/distributors/Datasheets_SAMA/624d57f8861bc75ef1b47830d520ec0a.pdf, Height=1.8mm, Manufacturer_Part_Number=CL31B474KBHNNNE, Mouser Price/Stock=https://www.mouser.co.uk/ProductDetail/Samsung-Electro-Mechanics/CL31B474KBHNNNE?qs=349EhDEZ59olbv7Lkudghw%3D%3D, Supplier 1=Digi-Key
C24 C25 C26 C27 C28 C29 C30 C31: library part CMP-06035-020548-1, "Chip Multilayer Ceramic Capacitors for General Purpose, 1206, 4.7uF, X5R, 15%, 10%, 50V", Capacitance=4.7uF, Case Code (Imperial)=1206, Case Code (Metric)=3216, Dielectric=X5R, Max Operating Temperature=85°C, Min Operating Temperature=-55°C, Tolerance=10%, Voltage=50V, Case/Package=1206, Depth=1.6mm, Height=0.85mm, Length=3.2mm, Material=Ceramic, Mount="Surface Mount", Packaging="Cut Tape", REACH SVHC="No SVHC", Thickness=850um, Voltage Rating=50V, Voltage Rating (DC)=50V, Width=1.6mm
C38 C39 C40 C41 C42: library part TPLH-3R0/450SS35X71, "No Description Available", Mfr_Name="TECATE GROUP", Supplier Part Number 1=2085-TPLH-3R0/450SS35X71-ND, Supplier 1=Digi-Key
C43 C44 C45: "47 µF ±20% 25V Ceramic Capacitor X5R 1206 (3216 Metric)", Capacitance=47uF, Manufacturer_Name=TDK, Mouser Part Number=N/A, Supplier Part Number 1=445-8047-1-ND, Datasheet Link=https://media.digikey.com/pdf/Data%20Sheets/TDK%20PDFs/mlcc_commercial_general_Rev2018.pdf, Height=1.8mm, Manufacturer_Part_Number=C3216X5R1E476M160AC., Mouser Price/Stock=https://www.mouser.com/Search/Refine.aspx?Keyword=N%2FA, Supplier 1=Digi-Key
C48: "Capacitor Polarised", Capacitor=220uF, Manufacturer_Name=KEMET, Supplier Part Number 1=399-A768MS227M1GLAS022CT-ND, Datasheet Link=https://connect.kemet.com:7667/gateway/IntelliData-ComponentDocumentation/1.0/download/specsheet/A768MS227M1GLAS022, Height=12.7mm, Manufacturer_Part_Number=A768MS227M1GLAS022, Supplier 1=Digi-Key
D1: library part 1N4007FLTR, "Diode", Manufacturer_Name=SMC, Datasheet Link=http://www.smc-diodes.com/propdf/1N4001FL-1N4007FL%20N1646%20REV.A.pdf, Height=1.4mm, Manufacturer_Part_Number=1N4007FLTR
D2: "Diode", Manufacturer_Name=Nexperia, Mouser Part Number=771-PMEG10010ELRX, Supplier Part Number 1=1727-2394-1-ND, Arrow Part Number=PMEG10010ELRX, Arrow Price/Stock=https://www.arrow.com/en/products/pmeg10010elrx/nexperia?region=nac, Datasheet Link=https://assets.nexperia.com/documents/data-sheet/PMEG10010ELR.pdf, Height=1.1mm, Manufacturer_Part_Number=PMEG10010ELRX, Mouser Price/Stock=https://www.mouser.co.uk/ProductDetail/Nexperia/PMEG10010ELRX?qs=bel5lzaZNxTBP7lsf64PhA%3D%3D, Supplier 1=Digi-Key
IC1: "Integrated Circuit", Manufacturer_Name="ROHM Semiconductor", Mouser Part Number=755-BD450M5FP-CE2, Supplier Part Number 1=BD450M5FP-CE2CT-ND, Datasheet Link=https://datasheet.datasheetarchive.com/originals/distributors/DKDS-10/186386.pdf, Manufacturer_Part_Number=BD450M5FP-CE2, Mouser Price/Stock=https://www.mouser.co.uk/ProductDetail/ROHM-Semiconductor/BD450M5FP-CE2?qs=zGux8KhMp6L1UcqyCxjOAw%3D%3D, Supplier 1=Digi-Key
IC2: "Integrated Circuit", Manufacturer_Name="Analog Devices", Mouser Part Number=700-MAX17701ATG+, Supplier Part Number 1=175-MAX17701ATG+-ND, Arrow Part Number=MAX17701ATG+, Arrow Price/Stock=https://www.arrow.com/en/products/max17701atg/maxim-integrated?region=nac, Datasheet Link=https://pdfserv.maximintegrated.com/en/ds/MAX17701.pdf, Height=0.8mm, Manufacturer_Part_Number=MAX17701ATG+, Mouser Price/Stock=https://www.mouser.co.uk/ProductDetail/Maxim-Integrated/MAX17701ATG%2b?qs=W%2FMpXkg%252BdQ4lZ0yRy8rVtg%3D%3D, Supplier 1=Digi-Key
IC3: "Integrated Circuit", Manufacturer_Name="Texas Instruments", Mouser Part Number=595-LM74502DDFR, Supplier Part Number 1=296-LM74502DDFRCT-ND, Arrow Part Number=LM74502DDFR, Arrow Price/Stock=https://www.arrow.com/en/products/lm74502ddfr/texas-instruments?region=nac, Datasheet Link=https://www.arrow.com/en/products/lm74502ddfr/texas-instruments?region=nac, Height=1.1mm, Manufacturer_Part_Number=LM74502DDFR, Mouser Price/Stock=https://www.mouser.co.uk/ProductDetail/Texas-Instruments/LM74502DDFR?qs=doiCPypUmgHnIUX9P1FS2A%3D%3D, Supplier 1=Digi-Key
J1: "Connector", Manufacturer_Name=Amphenol, Mouser Part Number=N/A, Arrow Part Number=T821110A1S100CEU, Arrow Price/Stock=https://www.arrow.com/en/products/t821110a1s100ceu/amphenol-fci?region=europe, Datasheet Link=https://docs.rs-online.com/e09c/0900766b81359cba.pdf, Height=9.15mm, Manufacturer_Part_Number=T821110A1S100CEU, Mouser Price/Stock=https://www.mouser.co.uk/ProductDetail/Amphenol/T821110A1S100CEU?qs=3IN%252Br8p6BrNf%2FuKCWm44Bg%3D%3D
L1: "Inductor", Manufacturer_Name=Bourns, Mouser Part Number=652-SRP1265WA-5R6M, Supplier Part Number 1=118-SRP1265WA-5R6MCT-ND, Datasheet Link=http://www.bourns.com/docs/Product-Datasheets/SRP1265WA.pdf, Height=6.5mm, Manufacturer_Part_Number=SRP1265WA-5R6M, Mouser Price/Stock=https://www.mouser.co.uk/ProductDetail/Bourns/SRP1265WA-5R6M?qs=81r%252BiQLm7BQx3ztxL9cqwg%3D%3D, Supplier 1=Digi-Key
LS1: library part CMI-1295-0585T, "Loudspeaker or Buzzer", Manufacturer_Name="CUI Devices", Mouser Part Number=490-CMI-1295-0585T, Supplier Part Number 1=102-CMI-1295-0585T-ND, Arrow Part Number=CMI-1295-0585T, Arrow Price/Stock=https://www.arrow.com/en/products/cmi-1295-0585t/cui-devices?region=nac, Datasheet Link=https://www.cuidevices.com/product/resource/pdf/cmi-1295-0585t.pdf, Height=9.7mm, Manufacturer_Part_Number=CMI-1295-0585T, Mouser Price/Stock=https://www.mouser.co.uk/ProductDetail/CUI-Devices/CMI-1295-0585T?qs=P1JMDcb91o6b8IYPugSq6A%3D%3D, Supplier 1=Digi-Key
P1: "Header, 6-Pin", LatestRevisionDate=17-Jul-2002, LatestRevisionNote="Re-released for DXP Platform.", Publisher="Altium Limited"
P2 P9: "Header, 2-Pin", LatestRevisionDate=17-Jul-2002, LatestRevisionNote="Re-released for DXP Platform.", Publisher="Altium Limited"
P3: library part "Header 4", "Header, 4-Pin", LatestRevisionDate=17-Jul-2002, LatestRevisionNote="Re-released for DXP Platform.", Publisher="Altium Limited"
P8: "Header, 3-Pin", LatestRevisionDate=17-Jul-2002, LatestRevisionNote="Re-released for DXP Platform.", Publisher="Altium Limited"
Q2 Q3 Q4 Q5: library part CMP-1091-00015-2, "MOSFET N-CH 40V 21A/98A TDSON", Continuous Drain Current (ID)=98A, Drain to Source Voltage (Vdss)=40V, Gate to Source Voltage (Vgs)=20V, Input Capacitance=1.8nF, Max Operating Temperature=150°C, Max Power Dissipation=52W, Min Operating Temperature=-55°C, Power Dissipation=2.5W, Halogen Free="Halogen Free", Lead Free="Contains Lead", Max Dual Supply Voltage=40V, Mount="Surface Mount", Number of Elements=1, Number of Pins=8, Packaging="Tape and Reel", Rds On Max=3.2mR, Rise Time=4ns, RoHS Compliant=Yes, Series=OptiMOS™
Q6 Q7: "MOSFET (N-Channel)", Manufacturer_Name="Diodes Inc.", Mouser Part Number=621-DMN4060SVT-7, Supplier Part Number 1=DMN4060SVT-7DICT-ND, Arrow Part Number=DMN4060SVT-7, Arrow Price/Stock=https://www.arrow.com/en/products/dmn4060svt-7/diodes-incorporated?region=asia, Datasheet Link=https://datasheet.lcsc.com/szlcsc/Diodes-Incorporated-DMN4060SVT-7_C155314.pdf, Height=1mm, Manufacturer_Part_Number=DMN4060SVT-7, Mouser Price/Stock=https://www.mouser.co.uk/ProductDetail/Diodes-Incorporated/DMN4060SVT-7?qs=gfe7vQ8txpVnyiyrFKlC5Q%3D%3D, Supplier 1=Digi-Key
R1 R4 R19 R20 R22 R23 R25: library part CMP-26527-000151-1, "10kΩ ±1% 0.25W 1206 Thick Film Chip Resistor AEC-Q200 compliant RMCF1206FT10K0", Case Code (Imperial)=1206, Case Code (Metric)=3216, Max Operating Temperature=155°C, Max Power Dissipation=250mW, Min Operating Temperature=-55°C, Resistance=10kR, Resistor Type="Thick Film", Temperature Coefficient=100ppm/°C, Tolerance=1%, Case/Package=1206, Construction=Rectangular, Contact Plating=Tin, Depth=1.6mm, Features="Automotive AEC-Q200", Height=0.028inch, Lead Free="Lead Free", Length=3.2mm, Military Standard=Not, Mount="Surface Mount", Number of Terminations=2, Packaging="Tape and Reel", Power Rating=250mW, Radiation Hardening=No, RoHS Compliant=Yes, Series=RMCF, Size Code=1206, Width=0.063inch
R2 R36: library part CMP-26527-000151-1, "10kΩ ±1% 0.25W 1206 Thick Film Chip Resistor AEC-Q200 compliant", Case Code (Imperial)=1206, Case Code (Metric)=3216, Max Operating Temperature=155°C, Max Power Dissipation=250mW, Min Operating Temperature=-55°C, Resistance=10kR, Resistor Type="Thick Film", Temperature Coefficient=100ppm/°C, Tolerance=1%, Case/Package=1206, Construction=Rectangular, Contact Plating=Tin, Depth=1.6mm, Features="Automotive AEC-Q200", Height=0.028inch, Lead Free="Lead Free", Length=3.2mm, Military Standard=Not, Mount="Surface Mount", Number of Terminations=2, Packaging="Tape and Reel", Power Rating=250mW, Radiation Hardening=No, RoHS Compliant=Yes, Series=RMCF, Size Code=1206, Width=0.063inch
R3 R24: "RES 200 OHM 1% 1/4W 1206", Manufacturer_Name="Stackpole Electronics", Resistance="200 Ohm", Supplier Part Number 1=RMCF1206FT200RCT-ND, Datasheet Link=https://cs.seielect.com/catalog/SEI-RMCF_RMCP.pdf, Height=0.7mm, Manufacturer_Part_Number=RMCF1206FT200R, Supplier 1=Digi-Key
R5 R18 R21: "No Description Available", Mfr_Name=Yageo, Resistance=75K, Supplier Part Number 1=311-75.0KFRCT-ND, Digi-Key_Part_Number_1=311-75.0KFRCT-ND, Digi-Key_Part_Number_2=311-75.0KFRDKR-ND, Digi-Key_Part_Number_3=311-75.0KFRTR-ND, Digi-Key_Part_Number_4=311-75.0KFRTR-NDL, Supplier 1=Digi-Key
R6: library part CMP-2003-03868-1, Manufacturer=Yageo, Resistance=7.15K, Part Number=RC1206FR-077K15L
R7: library part CMP-1014-00761-1, "174K 0.25W 1% 1206 (3216 Metric)  SMD", Case-EIA=1206, Case-Metric=3216, Power="0.25 W", Tolerance="1 %", Technology=SMT
R8: "Resistor", Manufacturer_Name=KEMET, Mouser Part Number=603-RC1206FR-0713KL, Resistance=13K, Supplier Part Number 1=2113674, Datasheet Link=https://www.sos.sk/productdata/35/10/4/35104/RC1206.pdf, Height=0.65mm, Manufacturer_Part_Number=RC1206FR-0713KL, Mouser Price/Stock=https://www.mouser.co.uk/ProductDetail/Yageo/RC1206FR-0713KL?qs=%2FbpERZPLKKvEuZQr9uTFqA%3D%3D, Supplier 1="Future Electronics"
R9: library part CMP-2003-03769-1, Manufacturer=Yageo, Resistance=43.2K, Part Number=RC1206FR-0743K2L
R10 R11: library part CMP-26527-000151-1, "10kΩ ±1% 0.25W 1206 Thick Film Chip Resistor AEC-Q200 compliant RMCF1206FT10K0", Case Code (Imperial)=1206, Case Code (Metric)=3216, Max Operating Temperature=155°C, Max Power Dissipation=250mW, Min Operating Temperature=-55°C, Resistance=10k, Resistor Type="Thick Film", Temperature Coefficient=100ppm/°C, Tolerance=1%, Case/Package=1206, Construction=Rectangular, Contact Plating=Tin, Depth=1.6mm, Features="Automotive AEC-Q200", Height=0.028inch, Lead Free="Lead Free", Length=3.2mm, Military Standard=Not, Mount="Surface Mount", Number of Terminations=2, Packaging="Tape and Reel", Power Rating=250mW, Radiation Hardening=No, RoHS Compliant=Yes, Series=RMCF, Size Code=1206, Width=0.063inch
R12: library part CMP-2003-01241-1, "RES 13.7K OHM 1% 1/4W 1206", Manufacturer="KOA Speer", Resistance=13.7K, Part Number=RK73H2BTTD1372F
R13: "No Description Available", Mfr_Name="Stackpole International", Resistance=140K, Supplier Part Number 1=738-RMCF1206FT140KCT-ND, Supplier 1=Digi-Key
R14 R15 R16 R17: library part CMP-2003-01299-1, Manufacturer="KOA Speer", Resistance=1ohm, Part Number=RK73H2BTTD1R00F
R26: "RES 0.005 OHM 1% 2W 2512", Manufacturer_Name=Bourns, Mouser Part Number=652-CRF2512FZR005ELF, Resistance=5m, Supplier Part Number 1=CRF2512-FZ-R005ELFCT-ND, Arrow Part Number=CRF2512-FZ-R005ELF, Arrow Price/Stock=https://www.arrow.com/en/products/crf2512-fz-r005elf/bourns?region=nac, Datasheet Link=https://www.arrow.com/en/products/crf2512-fz-r005elf/bourns, Height=0.8mm, Manufacturer_Part_Number=CRF2512-FZ-R005ELF, Mouser Price/Stock=https://www.mouser.co.uk/ProductDetail/Bourns/CRF2512-FZ-R005ELF?qs=iHX4uCgIbgMqZUuYK4Zqgg%3D%3D, Supplier 1=Digi-Key
R27: "RES SMD 40.2 OHM 0.1% 1/4W 1206", Manufacturer_Name=Bourns, Mouser Part Number=652-CRT1206BY40R2ELF, Resistance=40.2Ohm, Supplier Part Number 1=118-CRT1206-BY-40R2ELFCT-ND, Datasheet Link=http://www.bourns.com/docs/Product-Datasheets/crt-as.pdf, Height=0.65mm, Manufacturer_Part_Number=CRT1206-BY-40R2ELF, Mouser Price/Stock=https://www.mouser.co.uk/ProductDetail/Bourns/CRT1206-BY-40R2ELF?qs=oyIm%2F3giSj7POPsE94YyZg%3D%3D, Supplier 1=Digi-Key
SW1: library part CMP-03407-000008-1, "SWITCH TACTILE SPST-NO 0.05A 24V", Actuator Color=Natural, Case/Package=SMD/SMT, Contact Current Rating=50mA, Max Operating Temperature=85°C, Max Voltage Rating (DC)=12V, Min Operating Temperature=-40°C, Operating Force=160gf, Package Quantity=1000, Actuator Length=0.094inch, Actuator Material=Rubber, Actuator Type=Standard, Contact Material="Stainless Steel", Contact Plating=Silver, Current Rating=50mA, Depth=10mm, ELV=Compliant, Illumination Type=Illuminated, Lead Free="Lead Free", Length=6.2mm, Max Current Rating=50mA, Mechanical Life=5000000Cycles, Mount="Surface Mount", Orientation=Straight, Packaging="Tape and Reel", Radiation Hardening=No, RoHS Compliant=Yes, Switch Function=Off-Mom, Termination="Gull Wing", Throw Configuration=SPST, Type=Switch, Voltage Rating (DC)=12V
U1: library part CMP-0095-00269-2, "8-bit AVR Microcontroller, 32KB Flash, 1KB EEPROM, 2KB SRAM, 32-pin TQFP, Industrial Grade (-40°C to 85°C)", Code_JEDEC=MS-026-ABA, ComponentLink1Description="Manufacturer URL", ComponentLink1URL=http://www.atmel.com/, ComponentLink2Description="ATmega48A/48PA/88A/88PA/168A/168PA/328/328P Datasheet", ComponentLink2URL=http://www.atmel.com/dyn/resources/prod_documents/doc8271.pdf, ComponentLink3Description="ATmega48A/48PA/88A/88PA/168A/168PA/328/328P Summary", ComponentLink3URL=http://www.atmel.com/dyn/resources/prod_documents/8271S.pdf, DatasheetVersion="revD, May-2011", PackageDescription="32-Lead, 7x7x1.0 mm Body, 0.8mm Lead Pitch, Thin Profile Plastic Quad Flat Package (TQFP)", PackageReference=32A, PackageVersion="revC, Oct-2010", RevisionNote="DatasheetVersion & PackageVersion updated. URLs added."
U2 U3: "No Description Available", Mfr_Name=Vishay, Supplier Part Number 1=742-SQJQ140E-T1_GE3CT-ND, Supplier 1=Digi-Key
U4: "No Description Available", Mfr_Name=Vishay, Supplier Part Number 1=SIR170DP-T1-RE3CT-ND, Supplier 1=Digi-Key
Y1: "Crystal or Oscillator", Manufacturer_Name=ECS, Mouser Part Number=520-160-20-3XT, Supplier Part Number 1=XC1776CT-ND, Arrow Part Number=ECS-160-20-3X-TR, Arrow Price/Stock=https://www.arrow.com/en/products/ecs-160-20-3x-tr/ecs-international?region=nac, Datasheet Link=https://www.arrow.com/en/products/ecs-160-20-3x-tr/ecs-international, Height=2.3mm, Manufacturer_Part_Number=ECS-160-20-3X-TR, Mouser Price/Stock=https://www.mouser.co.uk/ProductDetail/ECS/ECS-160-20-3X-TR?qs=7Z%2FjUg96RbU1ElbRFXn8Rw%3D%3D, Supplier 1=Digi-Key

## Free pads (board coordinates)
  round 5.524 hole 4: 2(230.632,57.404) 3(230.505,49.784)
  round 14 hole 6.6: 4(225.933,135.89)
  round 1.524 hole 5 unplated: 5(59.436,9.779) 5(59.436,144.272) 5(237.871,9.779) 5(237.871,144.272)

## Via types
v1: diameter 0.6, hole 0.35, Top Layer to Bottom Layer, 576 vias
v2: diameter 0.6, hole 0.35, Top Layer to Bottom Layer, tented both sides, 128 vias
v3: diameter 1.27, hole 0.711, Top Layer to Bottom Layer, 53 vias
v4: diameter 0.65, hole 0.4, Top Layer to Bottom Layer, 7 vias

## Nets (pads, with @x,y where several pads share a name; then routed paths per layer and width w, separated by ;. In a path a pad name is that pad's centre, name@x,y a point inside that pad or via, vN(x,y) a via of type N, cw(c..) or ccw(c..) an arc to the next point about the centre after c; other vN are vias at no path point)
+5: C1.1 C6.1 IC1.2 J1.2 P1.4 P2.1 P3.3 P9.1 R1.1 U1.4 U1.6 U1.18 | length 24.2
  Top Layer w0.254: R1.1@62.844,31.369 63.352,30.861 69.469,30.861 69.977,30.353 71.12,30.353 P9.1@71.374,30.607 P2.1@71.374,33.909 ; C1.1@69.215,47.735 69.613,48.133 C1.1@69.723,48.133 ; J1.2@98.552,12.192 J1.2@98.806,12.192
  Top Layer w0.3: v3@82.129,42.323 82.415,42.037 v3(82.677,42.037)
  Top Layer w0.4: C1.1@69.215,47.735 v3(69.215,45.339) 69.42,45.339 70.036,44.723 70.358,44.723 ; U1.6@72.077,43.123 72.039,43.161 70.631,43.161 70.358,43.434 70.358,44.723 ; U1.4@72.077,44.723 70.358,44.723 ; U1.18@80.577,42.323 v3@82.129,42.323
  other v3: 115.443,18.161 117.729,18.161 115.443,20.13 117.729,20.13 115.443,22.098 117.729,22.098
CAP_VOLTAGE: C22.1 R18.2 R19.1 U1.19 | length 18.2
  Top Layer w0.254: U1.19@80.577,43.123 84.131,43.123 84.836,42.418 84.836,40.386 83.058,38.608 83.058,35.136 R19.1@83.312,34.882 88.401,34.882 C22.1@88.519,34.764
CHARGER_EN: R3.1 U1.10 | length 138.9
  Top Layer w0.254: v3(72.771,37.084) 72.96,37.273 72.96,37.922 72.973,37.943 74.164,39.134 74.166,39.136 74.327,39.304 U1.10@74.327,40.073 ; v3(199.11,48.768) 199.11,48.493 199.465,48.138 R3.1@199.465,46.482
  Bottom Layer w0.254: v3(72.771,37.084) 74.19,37.084 74.317,36.957 81.026,36.957 93.091,49.022 118.872,49.022 120.523,50.673 195.961,50.673 197.866,48.768 v3(199.11,48.768)
CSP: L1.2 R26.1 R27.1 | length 9.6
  Top Layer w0.203: R27.1@161.417,21.857 161.417,29.67 161.806,30.059 162.83,30.059 162.91,30.059 R26.1@162.997,29.972
DCIN: C5.1 C17.1 C18.2 C19.2 C46.1 C47.1 D1.1 IC1.1 IC2.18 IC3.5 pad.2 R7.1 RE.0 U4.1 U4.2 U4.3 | length 314.7
  Top Layer w0.254: C5.1@119.634,10.774 C5.1@119.782,10.922 C5.1@119.683,11.021 ; U4.1@192.508,57.658 192.61,57.658 195.15,55.118 v3(197.739,55.118) ; R7.1@199.898,52.371 R7.1@199.945,52.324 ; C17.1@200.279,58.322 204.499,58.322 207.01,60.833 v3(207.01,62.484) ; v3(207.772,73.025) 207.772,73.158 208.868,74.254 D1.1@208.868,74.549 ; IC2.18@221.959,29.313 222.234,29.313 223.057,30.136 C18.2@225.044,30.136 229.232,30.136 C19.2@229.235,30.139
  Top Layer w0.3: RE.0@207.628,88.265 207.143,87.78 207.143,78.815 206.993,78.665 206.993,77.36 208.728,75.625 208.728,74.689 D1.1@208.868,74.549
  Top Layer w0.4: C46.1@163.322,63.888 164.726,63.888 166.668,65.83 C47.1@168.807,65.83 168.807,67.507 IC3.5@168.709,67.605 ; IC3.5@168.382,67.605 IC3.5@168.709,67.605 ; 196.215,58.039 196.469,58.293 196.469,63.373 195.072,64.77 173.736,64.77 170.901,67.605 IC3.5@168.709,67.605 ; C19.2@229.235,30.139 v3(229.235,31.623)
  Top Layer w1: IC1.1@116.586,11.021 C5.1@119.683,11.021 ; v3(119.634,8.128) C5.1@119.634,10.774
  Bottom Layer w0.254: v3(197.739,55.118) 197.866,55.245 202.311,55.245 206.756,50.8 213.995,50.8 229.235,35.56 v3(229.235,31.623) ; v3(207.01,62.484) 207.201,62.674 207.201,72.707 207.518,73.025 v3(207.772,73.025)
  Bottom Layer w1: v3(119.634,8.128) 229.997,8.128 238.252,16.383 238.252,54.637 238.001,54.921 236.358,56.78 236.068,57.069 235.69,57.093 pad.2@230.632,57.404
FLG1: IC2.8 R11.2 U1.2 | length 197.4
  Top Layer w0.254: v4(70.39,46.415) 70.436,46.369 72.031,46.369 U1.2@72.077,46.323 ; IC2.8@219.259,26.113 219.259,25.362 219.326,25.295 219.326,23.879 v4(219.456,23.749) ; v3(221.107,16.891) 221.107,14.562 R11.2@221.191,14.478
  Bottom Layer w0.254: v4(70.39,46.415) 70.298,46.324 70.298,37.017 72.199,35.116 74.414,35.116 84.638,24.892 90.932,24.892 92.329,26.289 115.316,26.289 130.302,11.303 211.201,11.303 212.471,10.033 223.139,10.033 224.282,11.176 224.282,13.716 v3(221.107,16.891) 219.456,18.542 v4(219.456,23.749)
FLG2: IC2.7 R10.2 U1.9 | length 183.1
  Top Layer w0.254: v3(71.755,40.005) 73.459,40.005 U1.9@73.527,40.073 ; v4(218.186,24.511) 218.186,25.265 218.759,25.838 IC2.7@218.759,26.113 ; R10.2@221.191,11.684 222.356,11.684 222.864,12.192 v3(223.139,12.192)
  Bottom Layer w0.254: v3(71.755,40.005) 71.755,38.822 71.374,38.441 71.374,36.703 72.497,35.58 75.016,35.58 83.245,27.351 116.159,27.351 130.302,13.208 218.26,13.208 ; v4(218.186,24.511) 218.26,24.437 218.26,13.208 ; v3(223.139,12.192) 220.917,12.192 220.716,11.991 218.768,11.991 218.26,12.499 218.26,13.208
GND: C1.2 C2.2 C3.1 C4.1 C5.2 C6.2 C7.2 C10.2 C11.2 C12.2 C13.2 C14.2 C15.1 C16.2 C17.2 C19.1 C20.1 C22.2 C23.2 C24.2 C25.2 C26.2 C27.2 C28.2 C29.2 C30.2 C31.2 C42.2 C43.2 C44.2 C45.2 C47.2 C48.2 IC1.3 IC2.1 IC2.16 IC2.25 IC3.2 IC3.7 J1.4 J1.6 J1.8 J1.10 LS1.2 P1.6 P3.4 pad.3 pad.4 Q4.1 Q4.2 Q4.3 Q5.1 Q5.2 Q5.3 Q6.4 Q7.4 R2.2 R4.2 R6.2 R8.2 R12.1 R20.2 R23.2 R25.2 R36.2 SW1.3 SW1.4 U1.3 U1.5 U1.21 | length 38.2
  Top Layer w0.203: IC2.1@218.059,29.313 218.096,29.276 218.796,29.276 IC2.25@219.113,28.96 ; v1(219.109,28.956) IC2.25@219.113,28.96 ; v1(220.013,28.067) v1(220.918,28.067) ; IC2.25@220.259,28.313 IC2.25@220.009,28.063 IC2.25@219.113,28.96
  Top Layer w0.254: U1.5@72.077,43.923 73.768,43.923 73.787,43.942 ; U1.3@72.077,45.523 73.844,45.523 73.914,45.593 ; 78.486,44.704 78.505,44.723 U1.21@80.577,44.723 82.055,44.723 82.391,45.059 82.442,45.059 83.06,45.677 85.623,45.677 86.47,44.83 C2.2@86.47,44.45 ; IC3.2@165.882,68.905 IC3.7@168.382,68.905 ; v1(220.918,28.067) 221.164,28.313 IC2.16@221.959,28.313
  Bottom Layer w0.254: v1(92.71,9.398) v1(93.726,9.398) v1(93.726,10.395) 93.717,10.405 92.719,10.405 v1(92.71,10.414)
  Bottom Layer w0.4: v1(93.726,9.398) 106.68,9.398 v3(108.204,10.922)
  other v1: 219.109,27.178 220.013,27.178 220.918,27.178 219.109,28.067 220.013,28.956 220.918,28.956 159.181,132.916 160.694,132.916 162.207,132.916 159.181,134.339 160.694,134.339 162.207,134.339 159.181,135.761 159.181,137.183 159.181,138.606 160.694,138.606 162.207,138.606 159.181,140.028 160.694,140.028 162.207,140.028
  other v2: 199.644,20.616 200.533,20.616 201.422,20.616 202.312,20.616 199.644,21.614 200.533,21.614 201.422,21.614 202.312,21.614 199.644,22.611 200.533,22.611 201.422,22.611 202.312,22.611 199.644,23.608 200.533,23.608 201.422,23.608 202.312,23.608 199.644,24.605 200.533,24.605 201.422,24.605 202.312,24.605 199.644,25.602 200.533,25.602 201.422,25.602 202.312,25.602 160.316,39.115 161.314,39.115 162.311,39.115 163.308,39.115 164.305,39.115 165.302,39.115 166.299,39.115 167.297,39.115 168.294,39.115 169.291,39.115 170.288,39.115 171.285,39.115 172.283,39.115 173.28,39.115 174.277,39.115 175.274,39.115 176.271,39.115 177.268,39.115 232.918,39.516 233.807,39.516 234.696,39.516 235.561,39.516 160.316,40.005 161.314,40.005 162.311,40.005 163.308,40.005 164.305,40.005 165.302,40.005 166.299,40.005 167.297,40.005 168.294,40.005 169.291,40.005 170.288,40.005 171.285,40.005 172.283,40.005 173.28,40.005 174.277,40.005 175.274,40.005 176.271,40.005 177.268,40.005 232.918,40.513 233.807,40.513 234.696,40.513 235.561,40.513 160.316,40.894 161.314,40.894 162.311,40.894 163.308,40.894 164.305,40.894 165.302,40.894 166.299,40.894 167.297,40.894 168.294,40.894 169.291,40.894 170.288,40.894 171.285,40.894 172.283,40.894 173.28,40.894 174.277,40.894 175.274,40.894 176.271,40.894 177.268,40.894 178.266,40.894 179.263,40.894 180.26,40.894 181.257,40.894 232.918,41.51 233.807,41.51 234.696,41.51 235.561,41.51 160.316,41.783 161.314,41.783 162.311,41.783 163.308,41.783 164.305,41.783 165.302,41.783 166.299,41.783 167.297,41.783 168.294,41.783 169.291,41.783 170.288,41.783 171.285,41.783 172.283,41.783 173.28,41.783 174.277,41.783 175.274,41.783 176.271,41.783 177.268,41.783 178.266,41.783 179.263,41.783 180.26,41.783 181.257,41.783 235.586,44.055 232.918,44.08 233.807,44.08 234.696,44.08 232.918,45.052 233.807,45.052 234.696,45.052 235.586,45.052 232.918,46.049 233.807,46.049 234.696,46.049 235.586,46.049
  other v3: 110.426,10.922 112.649,10.922 108.204,13.271 110.426,13.271 112.649,13.271 108.204,15.621 110.426,15.621 112.649,15.621